# Altium PCB STM.PcbDoc
Units mil, origin at the board's own origin, x right, y up, seen from the top; angles counter-clockwise.
Board outline 6000 x 4000 mil, 2 copper layers (Top Layer, Bottom Layer); 60 components, 72 nets, 226 pads, 0 vias.
Unrouted connection lines stored in the file: 143.
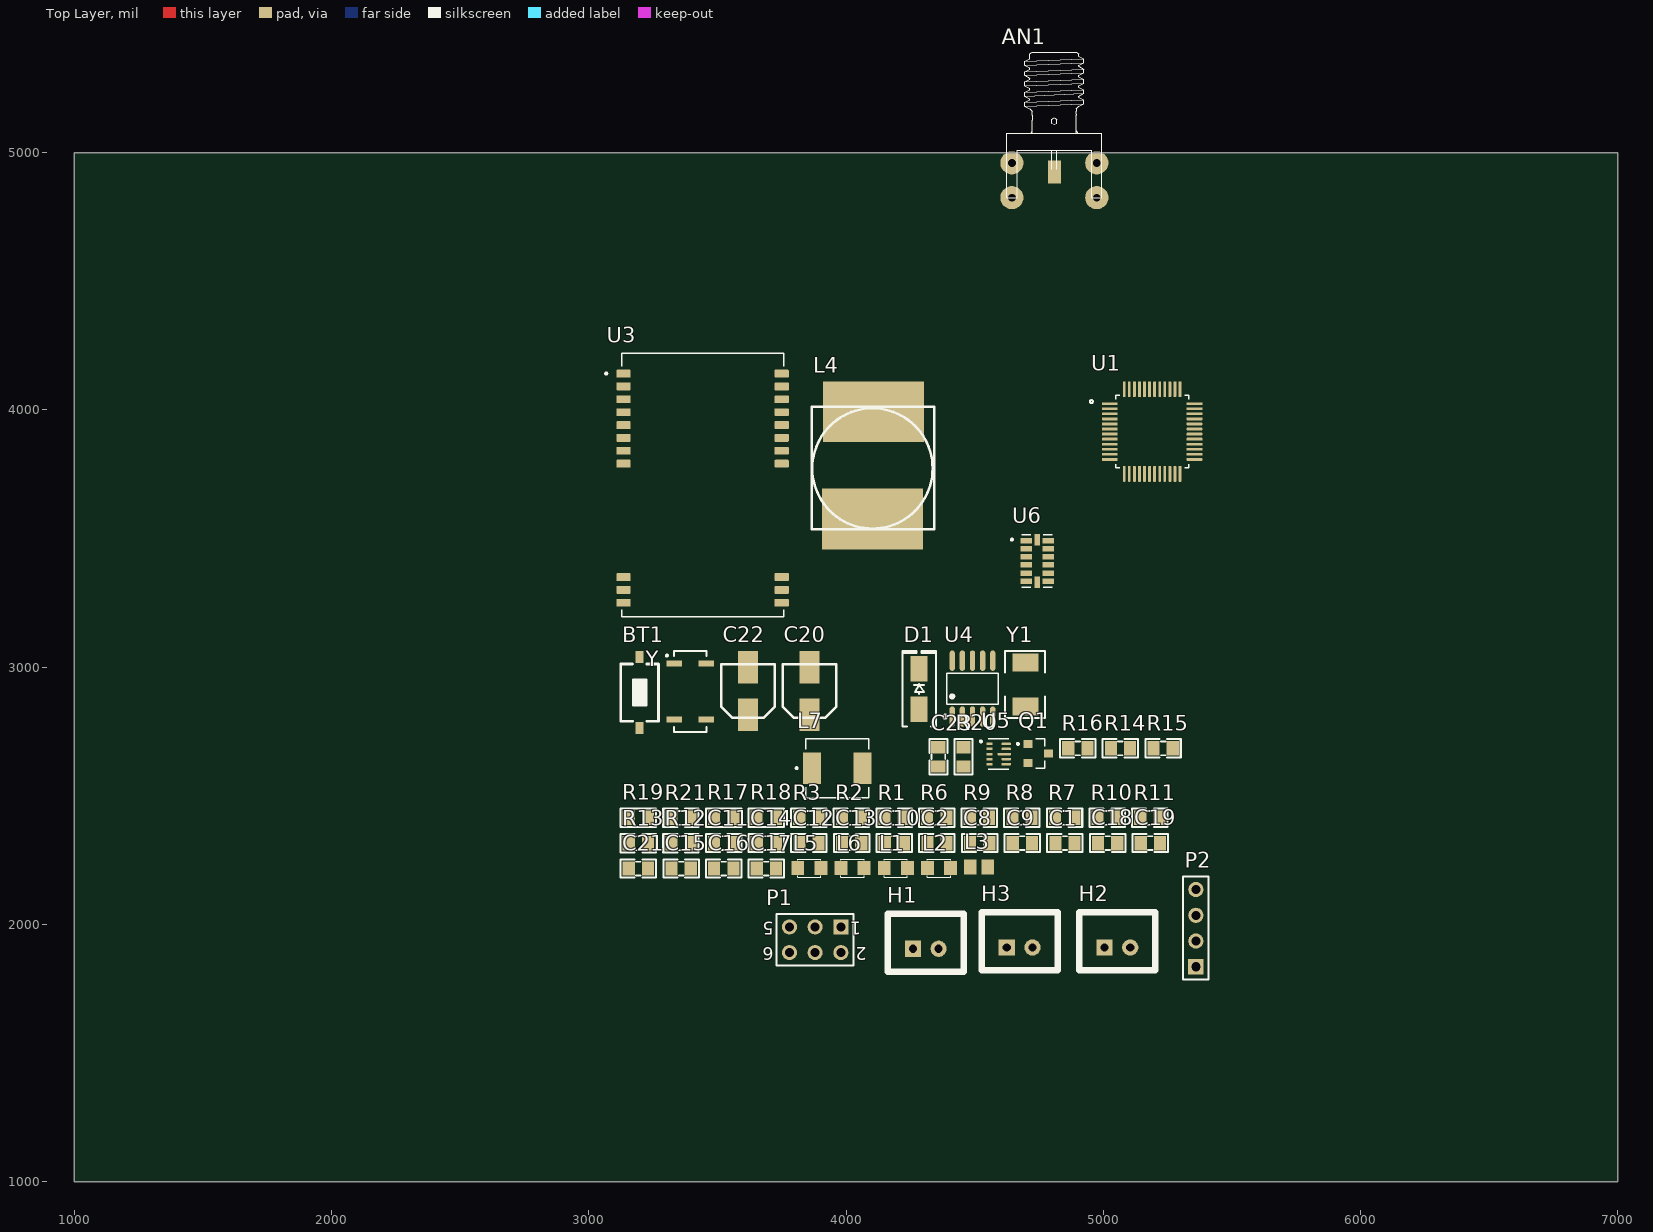
[diagram p0: Top Layer view]
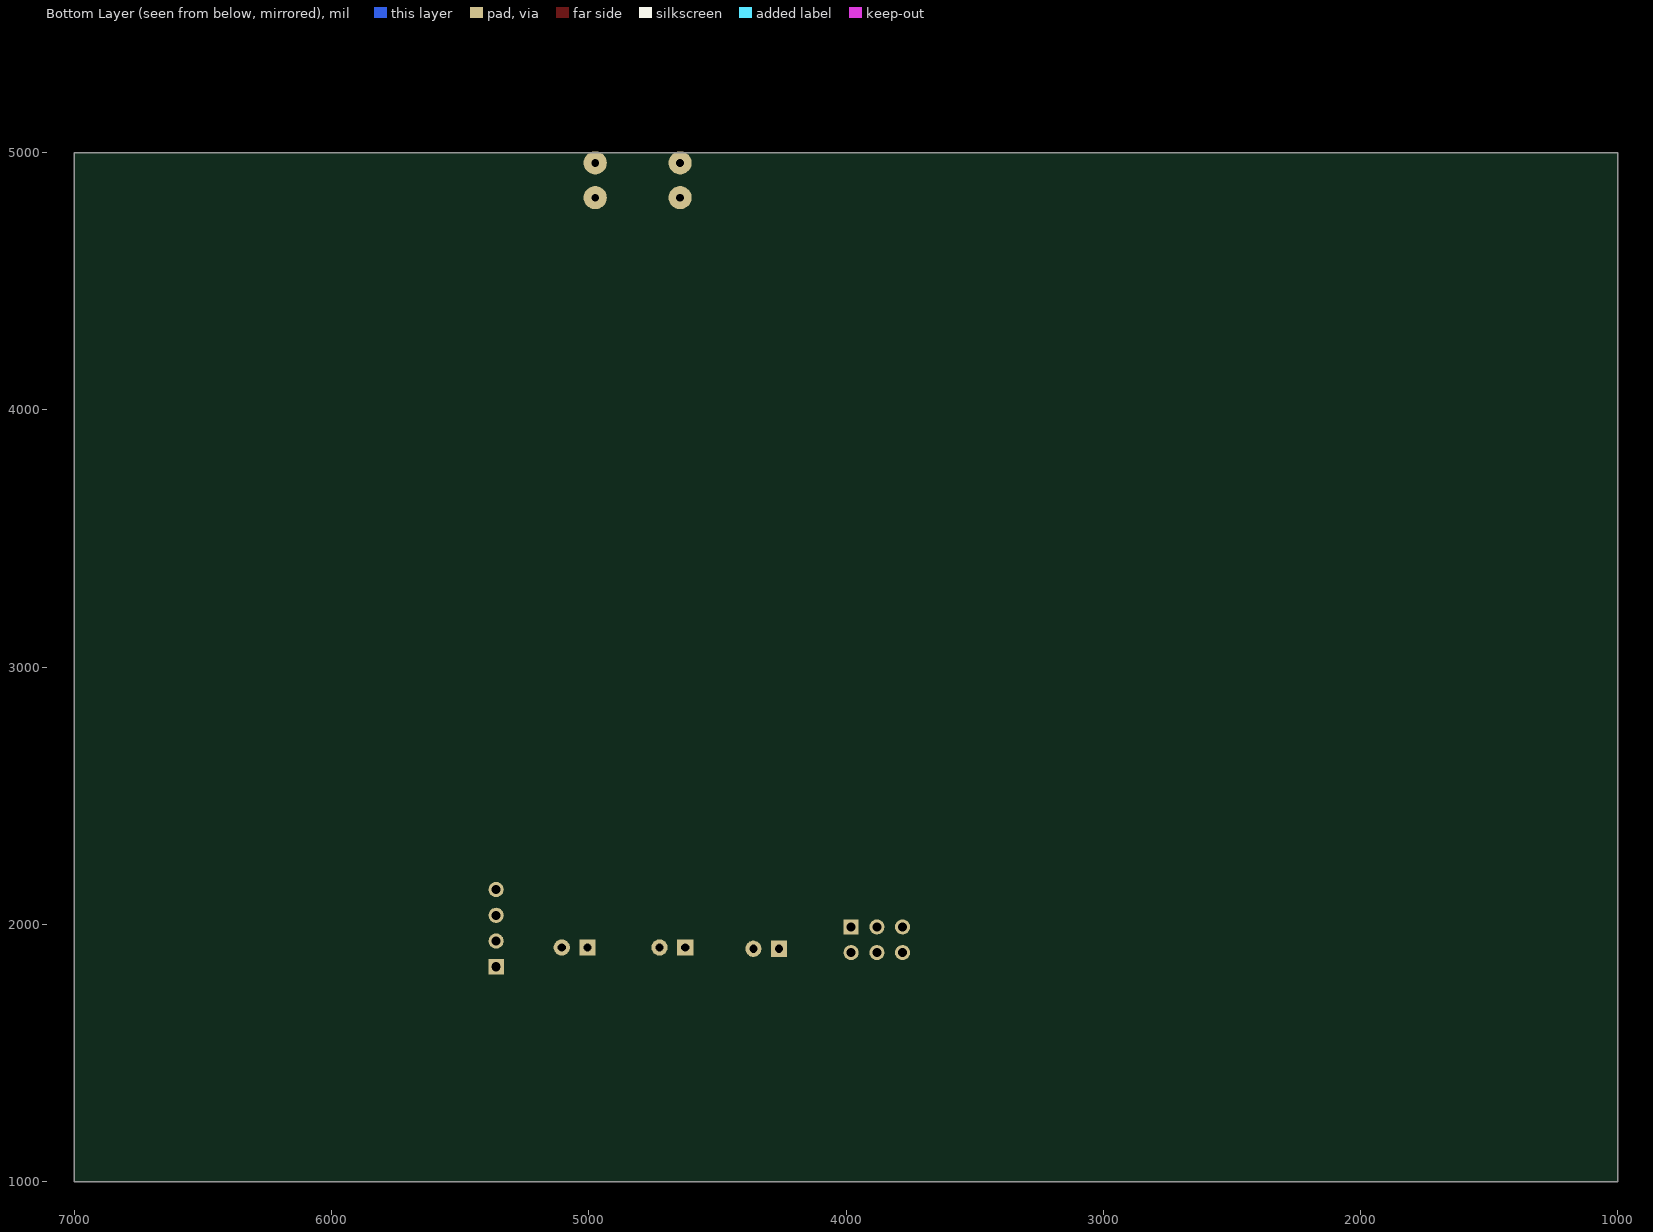
[diagram p1: Bottom Layer view, seen from below]

## Layer stack, top to bottom
Top Solder: solder mask 0.4, Solder Resist, Dk 3.5
Top Layer: signal copper 1.4
Dielectric 1: dielectric 12.6, FR-4, Dk 4.8
Bottom Layer: signal copper 1.4
Bottom Solder: solder mask 0.4, Solder Resist, Dk 3.5

## Board outline
1000,1000 7000,1000 7000,5000 1000,5000

## Design rules (kind name [scope] priority, off if disabled: settings)
Clearance [All] p1: gap=10 ignorepadtopadclearanceinfootprint=FALSE except(0: Arc-Hole Track-Hole SMDPad-Hole THPad-Hole Via-Hole Fill-Hole Poly-Hole Region-Hole Text-Hole)
PolygonConnect [All] p1: connectstyle=Relief reliefconductorwidth=10 reliefentries=4 polygonreliefangle="90 Angle" airgapwidth=10
RoutingVias [All] p1: holewidth=28 width=50 viastyle="Through Hole" minholewidth=28 minwidth=50 maxholewidth=28 maxwidth=50
SolderMaskExpansion [All] p1: expansion=4 istentingtop=FALSE
Width [All] p1: maxlimit=10 minlimit=10 preferedwidth=10
30 further rules are at their usual default settings.

## Classes and differential pairs
component class U_STM32_Schematic: BT1 C1 C2 C8 C9 C10 C11 C12 C13 C14 C15 L1 L2 P1 P2 R1 R2 R3 R6 R7 R8 U1 Y Y1
component class U_POWER: C16 C17 C18 C19 H1 L3 L7 R17 R18 R19 R20 U5
component class U_LORA: AN1 U3
component class U_CN3791_solar: C20 C21 C22 C23 D1 H2 H3 L4 L5 L6 Q1 R9 R10 R11 R12 R21 U4
component class U_ADXL345: R13 R14 R15 R16 U6

## Components (designator, comment, footprint, x,y, rotation, side; value= is the part's Value field where it differs from the comment)
AN1 "ANTENA" "De Anten SMA SMD" 4810,4925 r90 top
BT1 "Nut Nhan 2 Chan SMD 3x6x2.5" "Nut Nhan 2 Chan SMD 3x6x2.5" 3198,2900.96 r90 top
C1 "105" "Cap 0805" 4851.27,2315.54 r0 top
C2 "104" "Cap 0805" 4353.65,2315.54 r0 top
C8 "104" "Cap 0805" 4519.52,2315.54 r0 top
C9 "104" "Cap 0805" 4685.39,2315.54 r0 top
C10 "104" "Cap 0805" 4187.77,2315.54 r0 top
C11 "104" "Cap 0805" 3524.28,2315.54 r0 top
C12 "20pF" "Cap 0805" 3856.02,2315.54 r0 top
C13 "20pF" "Cap 0805" 4021.9,2315.54 r0 top
C14 "20pF" "Cap 0805" 3690.15,2315.54 r0 top
C15 "20pF" "Cap 0805" 3358.81,2216.66 r0 top
C16 "10uF" "Cap 0805" 3524.68,2216.66 r0 top
C17 "0.1uF" "Cap 0805" 3690.56,2216.66 r0 top
C18 "0.1uF" "Cap 0805" 5017.14,2315.54 r0 top
C19 "22uF" "Cap 0805" 5183.02,2315.54 r0 top
C20 "47uF" "tu nhom 5 (c)" 3857.95,2906.87 r90 top
C21 "100nF" "tu 0805" 3192.94,2216.66 r0 top
C22 "10uF" "tu nhom 5 (c)" 3619.29,2906.87 r90 top
C23 "220nF" "tu 0805" 4358.75,2650.61 r90 top
D1 "SS34" "DIODE SMA" 4284.09,2914.8 r90 top
H1 "Header 2P" XH2.54M-2 4260,1905 r0 top
H2 "Header 2P" XH2.54M-2 5005,1910 r0 top
H3 "Header 2P" XH2.54M-2 4625,1910 r0 top
L1 "LED 0805" LED-0805-Red 4148.5,2218.6 r0 top
L2 "LED 0805" LED-0805-Blue 4316.5,2218.6 r0 top
L3 "FB 6A 25E" INDC2012X145N 4516.98,2222.66 r0 top
L4 "10uH - 3A SMD" "Cuon Cam 12x12x10" 3866.72,3536.2 r0 top
L5 "LED" LED-0805-Green 3812.5,2218.6 r0 top
L6 "LED 0805" LED-0805-Red 3980.5,2218.6 r0 top
L7 "470nH" "CUON CAM SMD 0530" 3965.91,2606.87 r0 top
P1 "Header 3X2" HDR2X3 3980,1990 r180 top
P2 "ST-LINK" HDR1X4 5360,1835 r90 top
Q1 "A5SHB" TRANS_MMFTP2319 4747.19,2663.96 r0 top
R1 "100K" "tro smd 0805" 4186.85,2416.41 r0 top
R2 "100K" "tro smd 0805" 4021.18,2416.41 r0 top
R3 "10K" "tro smd 0805" 3855.51,2416.41 r0 top
R6 "510R" "tro smd 0805" 4352.52,2416.41 r0 top
R7 "510R" "tro smd 0805" 4849.53,2416.41 r0 top
R8 "510R" "tro smd 0805" 4683.86,2416.41 r0 top
R9 "0.05R" "tro smd 0805" 4518.19,2416.41 r0 top
R10 "2K" "tro smd 0805" 5015.2,2416.41 r0 top
R11 "178K" "tro smd 0805" 5180.86,2416.41 r0 top
R12 "120" "tro smd 0805" 3358.5,2317.54 r0 top
R13 "4.7K" "tro smd 0805" 3192.83,2317.54 r0 top
R14 "4.7K" "tro smd 0805" 5066.78,2686.61 r0 top
R15 "4.7K" "tro smd 0805" 5232.45,2686.61 r0 top
R16 "4.7K" "tro smd 0805" 4901.11,2686.61 r0 top
R17 "511K" "RES 0805" 3524.17,2414.41 r0 top
R18 "10K" "RES 0805" 3689.84,2414.41 r0 top
R19 "100K" "RES 0805" 3192.83,2414.41 r0 top
R20 "91K" "RES 0805" 4456.62,2650.71 r90 top
R21 "22K" "tro smd 0805" 3358.5,2416.41 r0 top
U1 "STM32F103C8T6" QFP50P900X900X160-48N 5190.03,3915.72 r0 top
U3 "E32-433T20S" MODULE_E32-433T20S 3442.52,3707.87 r0 top
U4 "CN3791" SSOP-10_L4.9-W3.9-P1.00-LS6.0-BL -13423.31,19882.99 r0 top
U5 "TPS63802DLAR" VREG_TPS63802DLAR 4593.33,2661.99 r0 top
U6 "ADXL345BCCZ" IC_ADXL345BCCZ 4743.21,3412.76 r0 top
Y "MC-306_32.7680K-A5:_ROHS" OSCL550P800X320X254-4N 3394.43,2904.96 r0 top
Y1 "8Mhz" "Thach Anh 2 chan SMD5032" 4698.13,2932.44 r90 top value=4Mhz

## Footprints (in the part's own frame and the unit in brackets; to place one, negate y for a bottom-side part, rotate by r counter-clockwise, add the part's x,y. Pads: shape width x height; smd on the part's side, far side on the other; paste and mask are expansions set on the pad)
"Cap 0805" [mm] "Compoment SMD 80x50mil"
  rect 1.2x1.4 smd: 1(-0.946,-0.003) 2(0.954,-0.003)
  silkscreen extent -1.75,-0.89 1.75,0.89, body extent -0.97,-0.61 1.03,0.64, height 1.23
"Cuon Cam 12x12x10" [mm] "Cuon Cam 12x12x10"
  rect 10x6 smd: 1(6.1,11.6) 2(6,1)
  silkscreen extent 0,0 12.1,12.1, body extent 0.1,-0.2 12.1,12.14, height 7.51
"CUON CAM SMD 0530" [mm] "CUON CAM SMD 0530"
  rect 1.8x3.1 smd: 1(-2.5,0) 2(2.5,0)
  silkscreen extent -4.1,-2.9 3.1,2.9, body extent -3.1,-2.88 3.1,2.92, height 3
"De Anten SMA SMD" [mil]
  rect 90x50 smd: 1(0,0)
  round 90 hole 30: 2(-100,165) 3(-100,-165) 4(35,-165) 5(35,165)
  silkscreen extent -100,-185 465,185, body extent -103,-186 441,189, height 156
"DIODE SMA" [mm] "SMA"
  rect 2.5x1.7 smd: 1(-2,0) 2(2,0)
  silkscreen extent -3.68,-1.65 3.75,1.65, body extent -2.6,-1.37 2.6,1.37, height 2.4
HDR1X4 [mm] "Connector; Header; 4 Position"
  rect 1.5x1.5 hole 0.9: 1(0,0)
  round 1.5 hole 0.9: 2(2.54,0) 3(5.08,0) 4(7.62,0)
  silkscreen extent -1.27,-1.27 8.89,1.27
HDR2X3 [mm] "Connector; Header; 3x2 Position"
  rect 1.5x1.5 hole 0.9: 1(0,0)
  round 1.5 hole 0.9: 2(0,2.54) 3(2.54,0) 4(2.54,2.54) 5(5.08,0) 6(5.08,2.54)
  silkscreen extent -1.27,-1.27 6.35,3.81
IC_ADXL345BCCZ [mm]
  rect 1.145x0.55 smd: 1(-1.098,2) 2(-1.098,1.2) 3(-1.098,0.4) 4(-1.098,-0.4) 5(-1.098,-1.2) 6(-1.098,-2) 8(1.098,-2) 9(1.098,-1.2) 10(1.098,-0.4) 11(1.098,0.4) 12(1.098,1.2) 13(1.098,2)
  rect 0.55x1.145 smd: 7(0,-2.097) 14(0,2.097)
  silkscreen extent -2.6,-2.6 1.5,2.6, body extent -1.5,-2.5 1.5,2.5, height 1
INDC2012X145N [mm]
  rect 1.2x1.47 smd: 1(-0.86,0) 2(0.86,0)
  body extent -1,-0.63 1,0.63, height 1.45
LED-0805-Blue [mil]
  rect 50x55 smd: 1(0,0) 2(90,0)
  silkscreen extent 0,-35 90,35, body extent 5,-25 85,25, height 43
LED-0805-Green [mil]
  rect 50x55 smd: 1(0,0) 2(90,0)
  silkscreen extent 0,-35 90,35, body extent 5,-25 85,25, height 43
LED-0805-Red [mil]
  rect 50x55 smd: 1(0,0) 2(90,0)
  silkscreen extent 0,-35 90,35, body extent 5,-25 85,25, height 43
MODULE_E32-433T20S [mm]
  rrect25% 1.41x0.77 smd: 1(-7.81,11) 2(-7.81,9.73) 3(-7.81,8.46) 4(-7.81,7.19) 5(-7.81,5.92) 6(-7.81,4.65) 7(-7.81,3.38) 8(-7.81,2.11) 11(-7.81,-9.09) 12(-7.81,-10.36) 13(-7.81,-11.63) 14(7.81,-11.63) 15(7.81,-10.36) 16(7.81,-9.09) 19(7.81,2.11) 20(7.81,3.38) 21(7.81,4.65) 22(7.81,5.92) 23(7.81,7.19) 24(7.81,8.46) 25(7.81,9.73) 26(7.81,11)
  silkscreen extent -9.61,-13 8,13, body extent -8,-13 8,13, height 3.25
"Nut Nhan 2 Chan SMD 3x6x2.5" [mm] "Switch SMD type"
  rect 1.2x0.8 smd: 1(-3.5,0) 2(3.5,0)
  silkscreen extent -2.82,-1.85 2.82,1.85, body extent -3.05,-1.85 3.05,1.85, height 2.5
OSCL550P800X320X254-4N [mm]
  rect 1.5x0.6 smd: 1(-1.575,2.75) 2(-1.575,-2.75) 3(1.575,-2.75) 4(1.575,2.75)
  silkscreen extent -2.4,-4 1.6,4
QFP50P900X900X160-48N [mm]
  rrect50% 1.56x0.28 smd: 1(-4.18,2.75) 2(-4.18,2.25) 3(-4.18,1.75) 4(-4.18,1.25) 5(-4.18,0.75) 6(-4.18,0.25) 7(-4.18,-0.25) 8(-4.18,-0.75) 9(-4.18,-1.25) 10(-4.18,-1.75) 11(-4.18,-2.25) 12(-4.18,-2.75) 25(4.18,-2.75) 26(4.18,-2.25) 27(4.18,-1.75) 28(4.18,-1.25) 29(4.18,-0.75) 30(4.18,-0.25) 31(4.18,0.25) 32(4.18,0.75) 33(4.18,1.25) 34(4.18,1.75) 35(4.18,2.25) 36(4.18,2.75)
  rrect50% 0.28x1.56 smd: 13(-2.75,-4.18) 14(-2.25,-4.18) 15(-1.75,-4.18) 16(-1.25,-4.18) 17(-0.75,-4.18) 18(-0.25,-4.18) 19(0.25,-4.18) 20(0.75,-4.18) 21(1.25,-4.18) 22(1.75,-4.18) 23(2.25,-4.18) 24(2.75,-4.18) 37(2.75,4.18) 38(2.25,4.18) 39(1.75,4.18) 40(1.25,4.18) 41(0.75,4.18) 42(0.25,4.18) 43(-0.25,4.18) 44(-0.75,4.18) 45(-1.25,4.18) 46(-1.75,4.18) 47(-2.25,4.18) 48(-2.75,4.18)
  silkscreen extent -6.15,-3.6 3.6,3.6, body extent -4.5,-4.5 4.5,4.5, height 1.6
"RES 0805" [mm]
  rect 1.2x1.4 smd: 1(-0.946,-0.01) 2(0.954,-0.01)
  silkscreen extent -1.75,-0.91 1.75,0.89, body extent -1,-0.62 1,0.63, height 0.5
SSOP-10_L4.9-W3.9-P1.00-LS6.0-BL [mm]
  oval 0.525x2.014 smd paste+0 mask+0.051: 1(453.042,-433.713) 2(454.042,-433.713) 3(455.042,-433.713) 4(456.042,-433.713) 5(457.042,-433.713) 6(457.042,-428.199) 7(456.042,-428.199) 8(455.042,-428.199) 9(454.042,-428.199) 10(453.042,-428.199)
  silkscreen extent 452.18,-433.86 457.57,-429.43
"Thach Anh 2 chan SMD5032" [mil] "DO-214-AA/SMB; 2 C-Bend Leads; Body 5.3 x 3.6 mm, inc. leads (LxW)"
  rect 70x100 smd: 1(-85,0) 2(85,0)
  silkscreen extent -130,-75 130,80, body extent -98,-63 98,63, height 51
TRANS_MMFTP2319 [mm]
  rect 0.9x0.8 smd: 1(-1,0.95) 2(-1,-0.95) 3(1,0)
  silkscreen extent -2.1,-1.45 0.65,1.45, body extent -1.2,-1.45 1.2,1.45, height 1.2
"tro smd 0805" [mm]
  rect 1.2x1.4 smd: 1(-0.946,-0.061) 2(0.954,-0.061)
  silkscreen extent -1.75,-0.97 1.75,0.84, body extent -1.56,-0.76 1.44,0.64, height 0.53
"tu 0805" [mm] "Compoment SMD 80x50mil"
  rect 1.2x1.4 smd: 1(-0.946,-0.003) 2(0.954,-0.003)
  silkscreen extent -1.75,-0.89 1.75,0.89, body extent -1.01,-0.64 1.01,0.63, height 0.61
"tu nhom 5 (c)" [mm]
  rect 3.2x2 smd: 1(-2.35,0) 2(2.35,0)
  silkscreen extent -2.65,-2.65 2.65,2.65, body extent -3.15,-2.65 3.15,2.65, height 5.7
VREG_TPS63802DLAR [mm]
  rrect40% 0.6x0.25 smd mask+0: 1(-0.9,1) 2(-0.9,0.5) 3(-0.9,0) 4(-0.9,-0.5) 5(-0.9,-1)
  rrect40% 0.9x0.25 smd mask+0: 6(0.75,-1) 7(0.75,-0.5) 9(0.75,0.5) 10(0.75,1)
  rrect40% 1.3x0.25 smd paste-2 mask+0: 8(0.55,0)
  silkscreen extent -1.85,-1.5 1,1.5, body extent -1,-1.5 1,1.5, height 1
XH2.54M-2 [mm]
  rect 1.6x1.6 hole 0.8: 1(0,0)
  round 1.6 hole 0.8: 2(2.54,0)
  silkscreen extent -2.48,-2.26 5.02,3.46, body extent -2.48,-2.26 5.02,3.48, height 6.91

## Part data
AN1: library part "ANTEN SMA THANG", "Generic Antenna"
C1 C2 C8 C9 C10 C11 C12 C13 C14 C15 C16 C17 C18 C19: library part "Cap 0805", "Capacitor SMD 0805"
C20 C22: library part "Tu Nhom 10uF 20V", "Dán", Chung_Loai=Dán, Don_Vi=Con, Ma_Hang=MH004016, So_Chan=2, Ten_Linh_Kien="Tụ Nhôm 10uF 20V"
C21 C23: library part "Tu 0805 33nF 50V 20%", "Dán", Chung_Loai=Dán, Don_Vi=Con, Ma_Hang=MH007854, So_Chan=2, Ten_Linh_Kien="Tụ 0805 33nF 50V 20%"
D1: library part "Diode SS34 ( 1N5822 )", "Dán", Chung_Loai=Dán, Don_Vi=Con, Ma_Hang=MH002104, Ten_Linh_Kien="Diode SS34 3A 40V SMA ( 1N5822 SS34A)"
H1 H2 H3: library part "Header 2P 2.54 Duc Thang", "Cắm", Chung_Loai=Cắm, Don_Vi=Con, Ma_Hang=MH001283, Ten_Linh_Kien="Header 2P XH2.54-2P Đực Thẳng"
L1 L6: library part "LED 0805 Do", "Dán", Chung_Loai=Dán, Don_Vi=Con, Ma_Hang=MH000897, Ten_Linh_Kien="LED 0805 Màu Đỏ (Red)"
L2: library part "LED 0805 Xanh Duong", "Dán", Chung_Loai=Dán, Don_Vi=Con, Ma_Hang=MH002327, Ten_Linh_Kien="LED 0805 Màu Xanh Dương (Blue)"
L3: library part MLZ2012N220LT000, "22 ÂµH Shielded Multilayer Inductor 300 mA 670mOhm 0805 (2012 Metric)", Package="2012 Bourns", Check_prices=https://www.snapeda.com/parts/MLZ2012N220LT000/TDK/view-part/?ref=eda, MF=TDK, MP=MLZ2012N220LT000, SnapEDA_Link=https://www.snapeda.com/parts/MLZ2012N220LT000/TDK/view-part/?ref=snap
L4: library part "CUON CAM 100uH SMD", "Dán", Chung_Loai=Dán, Don_Vi=Con, Ten_Linh_Kien="Cuộn Cảm 100uH 7x7x4MM CD74"
L5: library part "LED 0805 Xanh La", "Dán", Chung_Loai=Dán, Don_Vi=Con, Ma_Hang=MH002326, Ten_Linh_Kien="LED 0805 Màu Xanh Lá (Green)"
L7: library part "Cuon Cam SMD 0530", "SMD 0530", Package=None, Availability=Unavailable, MP=FDV0530-H-1R5M=P3, Price=None
P1: "Header, 3-Pin, Dual row", LatestRevisionDate=17-Jul-2002, LatestRevisionNote="Re-released for DXP Platform.", Publisher="Altium Limited"
P2: library part "Header 4", "Header, 4-Pin", LatestRevisionDate=17-Jul-2002, LatestRevisionNote="Re-released for DXP Platform.", Publisher="Altium Limited"
Q1: library part MMFTP2319, "MOSFET, SOT-23, P, -40V, -4.2A, 0.08â„", Package="SOT-23 Diotec", Check_prices=https://www.snapeda.com/parts/MMFTP2319/Diotec/view-part/?ref=eda, MF="Diotec Semiconductor", MP=MMFTP2319, SnapEDA_Link=https://www.snapeda.com/parts/MMFTP2319/Diotec/view-part/?ref=snap
R1 R2 R3 R6 R7 R8 R13 R14 R15 R16: library part "Tro 0805 1% 0.5R", "Dán", Chung_Loai=Dán, Don_Vi=Con, Ma_Hang=MH005465, So_Chan=2, Ten_Linh_Kien="Trở 0805 1% 0.5R"
R9 R10 R11 R12 R21: library part "Tro 0805 1% 1k", "Dán", Chung_Loai=Dán, Don_Vi=Con, Ma_Hang=MH005468, So_Chan=2, Ten_Linh_Kien="Trở 0805 1% 1k"
R17 R18 R19 R20: library part "RES 0805", "RES SMD 0805", Manufacturer="Vishay Dale", Manufacturer Part Number=CRCW040210K0FKED, Operating Temperature="-55°C ~ 155°C", Package / Case="0402 (1005 Metric)", Power (Watts)="0.063W, 1/16W", Resistance (Ohms)=10k, Supplier Part Number 1=541-10.0KLCT-ND, Temperature Coefficient=±100ppm/°C, Tolerance=±1%, Category=Resistors, ComponentLink1Description=http://www.vishay.com/docs/20035/dcrcwe3.pdf, ComponentLink1URL=http://www.vishay.com/docs/20035/dcrcwe3.pdf, Composition="Thick Film", Features="Automotive AEC-Q200", Height="0.016\" (0.40mm)", Number of Terminations=2, Packaging="Cut Tape (CT)", Pricing 1="10=0.083, 50=0.0444, 200=0.0255, 1000=0.0174 (USD)", RoHS="RoHS Compliant", Size / Dimension="0.039\" L x 0.020\" W (1.00mm x 0.50mm)", Stock 1=2392462, Supplier 1=Digi-Key, Supplier Device Package="0402 (1005 Metric)"
U1: "ARM® Cortex®-M3 STM32F1 Microcontroller IC 32-Bit 72MHz 64KB (64K x 8) FLASH 48-LQFP (7x7)", Package="LQFP-48 STMicroelectronics", Check_prices=https://www.snapeda.com/parts/STM32F103C8T6/STMicroelectronics/view-part/?ref=eda, MF=STMicroelectronics, MP=STM32F103C8T6, SnapEDA_Link=https://www.snapeda.com/parts/STM32F103C8T6/STMicroelectronics/view-part/?ref=snap
U3: "Wireless serial port module (UART)", Package=Package, Availability="Not in stock", Check_prices=https://www.snapeda.com/parts/E32-433T20S/EBYTE/view-part/?ref=eda, MF=EBYTE, MP=E32-433T20S, Price=None, SnapEDA_Link=https://www.snapeda.com/parts/E32-433T20S/EBYTE/view-part/?ref=snap
U5: "2-A, high-efficient, 11-ÂµA quiescent current buck-boost converter in QFN/DFN package", Package="VSON-HR-10 Texas Instruments", Check_prices=https://www.snapeda.com/parts/TPS63802DLAR/Texas+Instruments/view-part/?ref=eda, MF="Texas Instruments", MP=TPS63802DLAR, SnapEDA_Link=https://www.snapeda.com/parts/TPS63802DLAR/Texas+Instruments/view-part/?ref=snap
U6: "3-Axis, Â±2 g/Â±4 g/Â±8 g/Â±16 g Digital Accelerometer", Package="LGA -14 Analog Devices", Check_prices=https://www.snapeda.com/parts/ADXL345BCCZ/Analog+Devices/view-part/?ref=eda, MF="Analog Devices", MP=ADXL345BCCZ, SnapEDA_Link=https://www.snapeda.com/parts/ADXL345BCCZ/Analog+Devices/view-part/?ref=snap
Y: "32.768kHz Â±100ppm Crystal 12.5pF 50 kOhms 4-SOJ, 5.50mm pitch", Package="4-4 Epson", Availability=Unavailable, MF=EPSON, MP="MC-306 32.7680K-A5: ROHS", Price=None, SnapEDA_Link=https://www.snapeda.com/parts/MC-306%2032.7680K-A5%3A%20ROHS/EPSON/view-part/620500/?ref=snap
Y1: library part "Thach Anh 2 chan SMD 5032", "Crystal For all Crystal 2pin."
BT1: Ma_Hang=MH001036, Ten="Nút Nhấn 2 Chân 3x6x2.5MM SMD"

## Nets (pads, with @x,y where several pads share a name; then routed paths per layer and width w, separated by ;. In a path a pad name is that pad's centre, name@x,y a point inside that pad or via, vN(x,y) a via of type N, cw(c..) or ccw(c..) an arc to the next point about the centre after c; other vN are vias at no path point)
BOOT0: R1.2 U1.44
BOOT1: R2.1 U1.20
GND: AN1.2 AN1.3 AN1.4 AN1.5 BT1.1 C1.1 C2.1 C8.1 C9.1 C10.1 C11.1 C13.2 C15.2 C16.2 C17.2 C18.2 C19.2 C20.2 C22.2 C23.2 D1.2 H1.1 H2.1 H3.2 P1.5 P1.6 P2.1 R6.2 R15.2 R20.1 R21.1 U1.8 U1.23 U1.35 U1.47 U3.2 U3.8 U3.11 U3.13 U3.14 U3.15 U3.16 U3.19 U3.26 U4.2 U5.2 U5.3 U5.8 U6.2 U6.4 U6.5
NetAN1_1: AN1.1 U3.12
NetC12_2: C12.2 C14.2
NetC18_1: C18.1 C19.1 L3.1 R17.2 U5.6
NetC20_1: C20.1 C21.1 H2.2 Q1.2 R10.2 R11.2 U4.9
NetC21_2: C21.2 U4.1
NetC22_1: C22.1 H3.1 R9.1 U4.7
NetC23_1: C23.1 R12.1
NetD1_1: D1.1 L4.1 Q1.3
NetL1_2: L1.2 R6.1
NetL2_2: L2.2 R8.1
NetL4_2: L4.2 R9.2 U4.8
NetL5_1: L5.1 L6.1 R10.1
NetL5_2: L5.2 U4.4
NetL6_2: L6.2 U4.3
NetL7_1: L7.1 U5.7
NetL7_2: L7.2 U5.9
NetP1_3: P1.3 R1.1
NetP1_4: P1.4 R2.2
NetQ1_1: Q1.1 U4.10
NetR11_1: R11.1 R21.2 U4.6
NetR12_2: R12.2 U4.5
NetR13_2: R13.2 U6.7
NetR14_1: R14.1 U1.45 U6.14
NetR15_1: R15.1 U6.12
NetR16_1: R16.1 U1.46 U6.13
NetR17_1: R17.1 R20.2 U5.4
NetR18_2: R18.2 U5.1
NetR19_1: R19.1 U5.5
NetU1_17: U1.17 U3.21
NetU1_29: U1.29 U3.20
NetU1_30: U1.30 U3.22
NetU1_31: U1.31 U3.23
NetU3_24: U3.24
NetU6_8: U6.8
NetU6_9: U6.9
OSCIN: C12.1 R7.2 U1.5 Y1.1
OSCOUT: C14.1 R7.1 U1.6 Y1.2
PA0: U1.10
PA1: U1.11
PA2: U1.12
PA3: U1.13
PA4: U1.14
PA5: U1.15
PA6: U1.16
PA11: U1.32
PA12: U1.33
PA15: U1.38
PB0: U1.18
PB1: U1.19
PB3: U1.39
PB4: U1.40
PB5: U1.41
PB6: U1.42
PB7: U1.43
PB10: U1.21
PB11: U1.22
PB12: U1.25
PB13: U1.26
PB14: U1.27
PB15: U1.28
PC13: R8.2 U1.2
PC14: C13.1 U1.3 Y.1
PC15: C15.1 U1.4 Y.4
RESET: BT1.2 C1.2 R3.1 U1.7
SWCLK: P2.2 U1.37
SWDIO: P2.3 U1.34
VBAT: U1.1
VCC: C16.1 C17.1 H1.2 R18.1 R19.2 U5.10
VCC3V3: C2.2 C8.2 C9.2 C10.2 C11.2 L1.1 L2.1 L3.2 P1.1 P1.2 P2.4 R3.2 R13.1 R14.2 R16.2 U1.9 U1.24 U1.36 U1.48 U3.25 U6.1 U6.6
pads on no net: U3.1 U3.3 U3.4 U3.5 U3.6 U3.7 U6.3 U6.10 U6.11 Y.2 Y.3

## Text inside footprints (layer, text, board x,y; h text height)
P1: Top Overlay "6" at 3720,1910 h50 r180; Top Overlay "5" at 3720,2010 h50 r180; Top Overlay "2" at 4080,1910 h50 r180; Top Overlay "1" at 4060,2010 h50 r180